# Altium PCB IMOB_TAG_hv1.PcbDoc
Units mm, origin at the board's own origin, x right, y up, seen from the top; angles counter-clockwise.
Board outline 23.94 x 25.73 mm, 2 copper layers (Top Layer, Bottom Layer); 45 components, 28 nets, 116 pads, 102 vias.
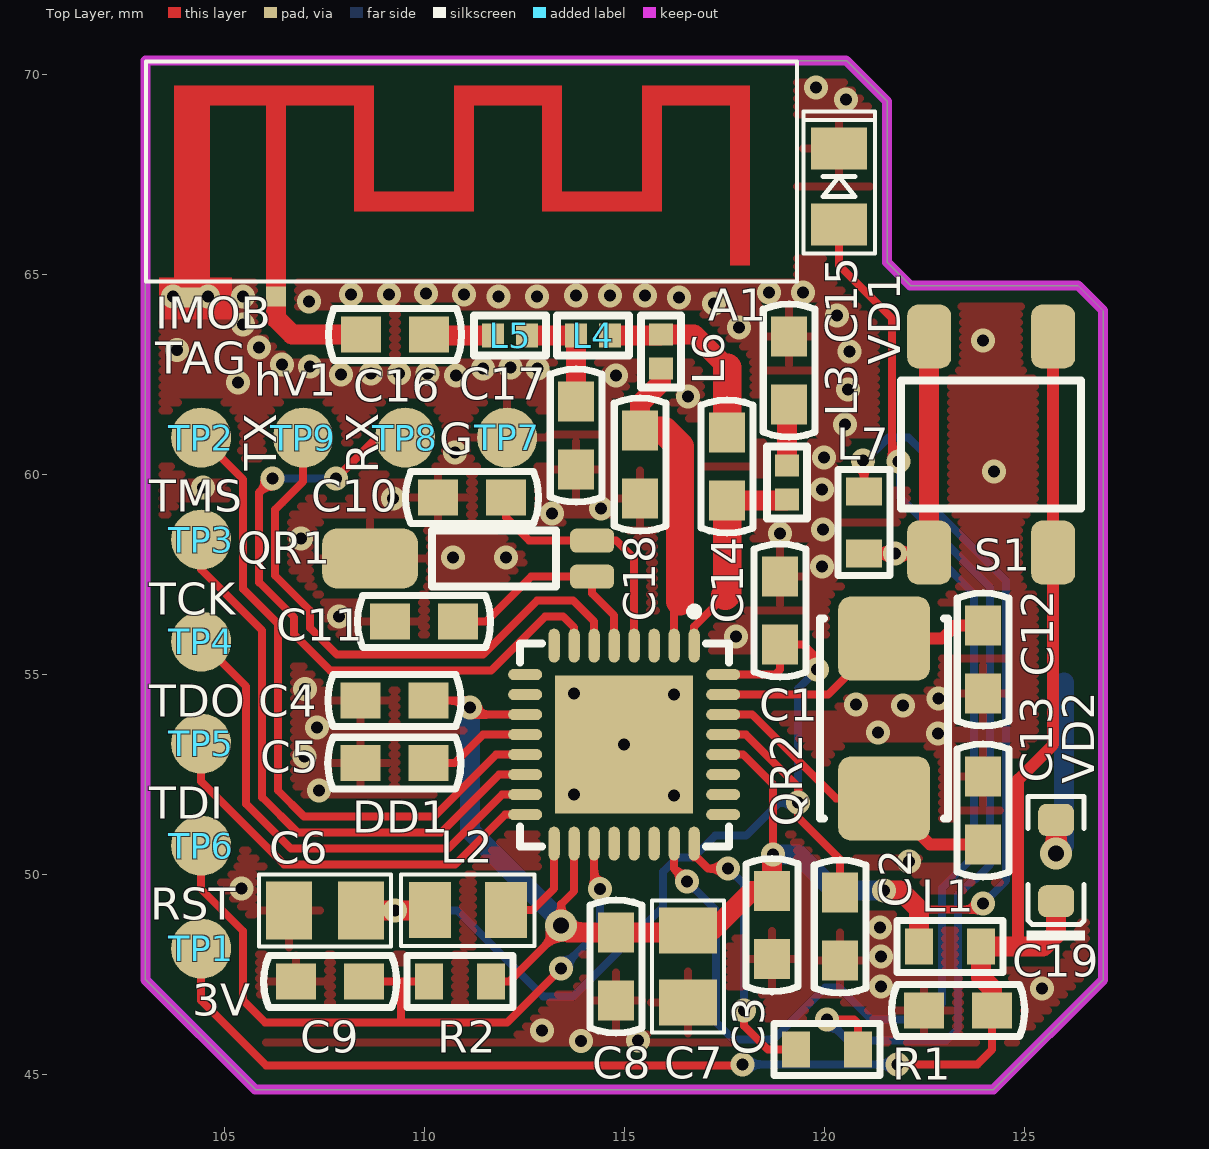
[diagram p0: Top Layer view]
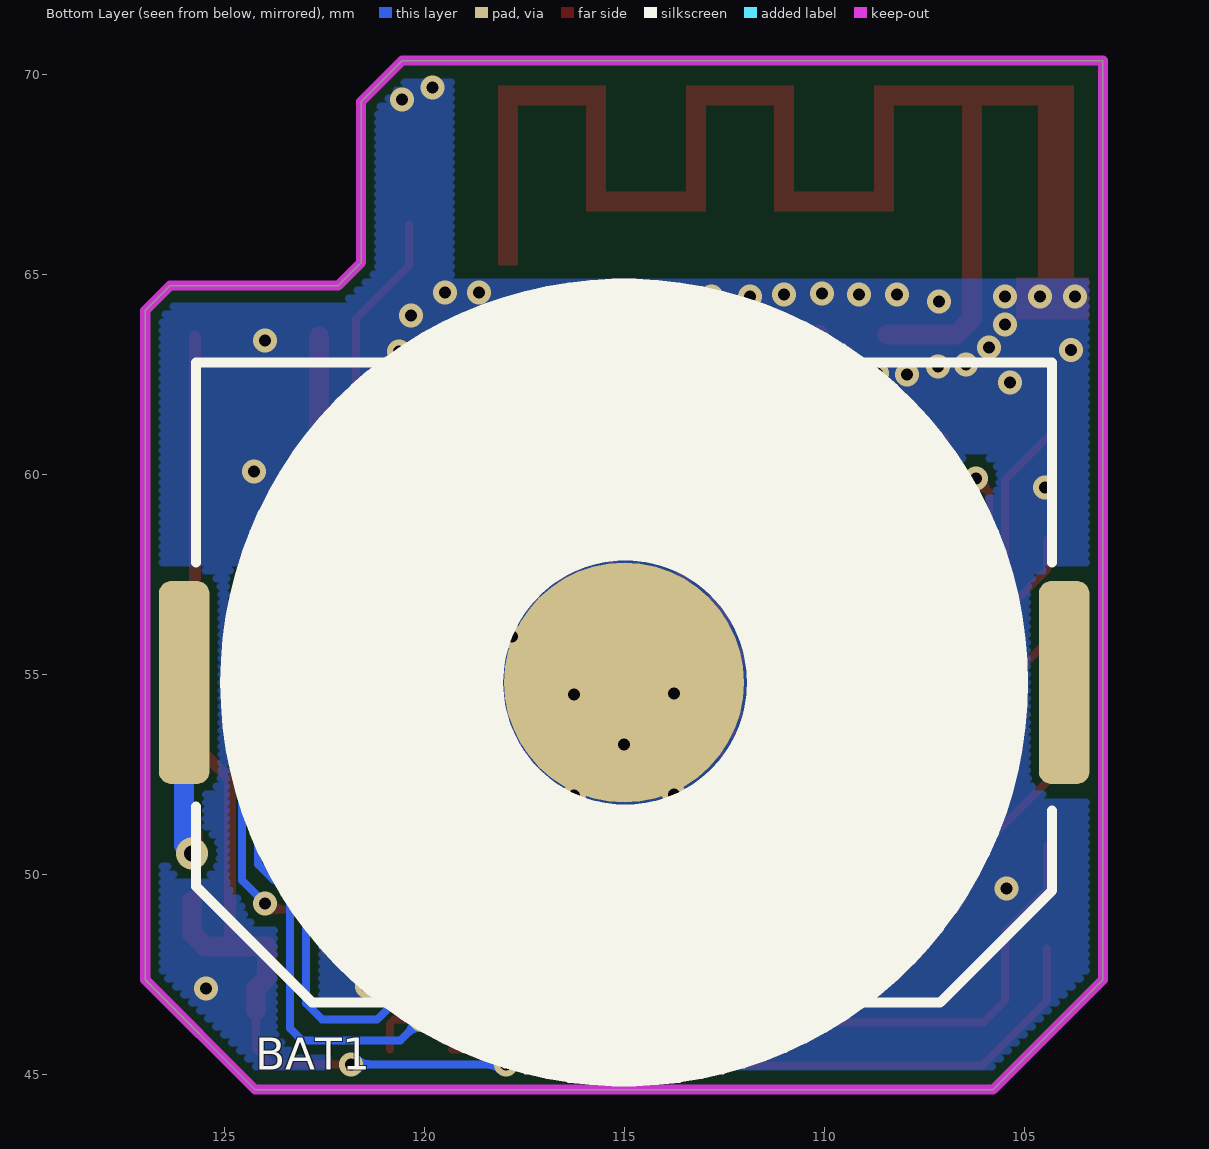
[diagram p1: Bottom Layer view, seen from below]
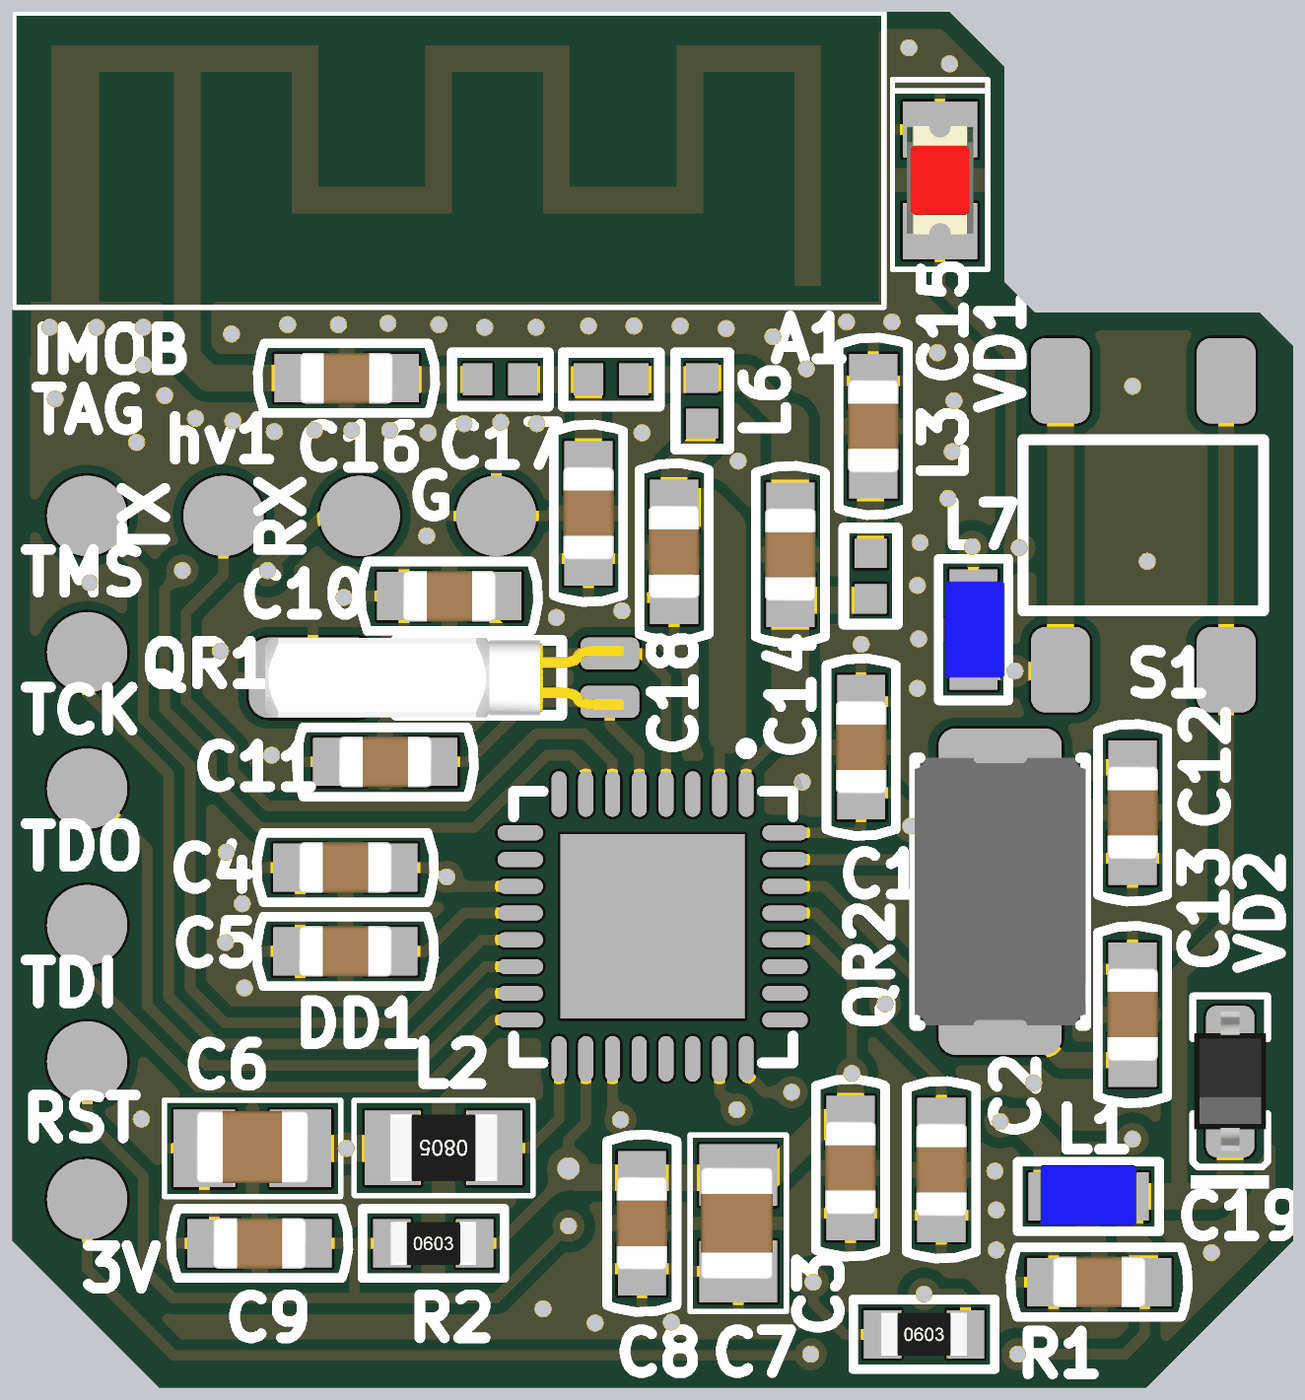
[diagram p2: 3D render of the assembled board from above, using the file's embedded part models]

## Layer stack, top to bottom
Top Solder: solder mask 0.0102, Solder Resist, Dk 3.5
Top Layer: signal copper 0.0356
Dielectric 1: dielectric 0.32, FR-4, Dk 4.8
Bottom Layer: signal copper 0.0356
Bottom Solder: solder mask 0.0102, Solder Resist, Dk 3.5

## Board outline
103.03,47.37 105.775,44.625 124.229,44.625 126.973,47.37 126.973,64.1 126.348,64.725 122.15,64.725 121.575,65.3 121.575,69.325 120.55,70.35 103.03,70.35

## Design rules (kind name [scope] priority, off if disabled: settings)
Clearance [All] p1: gap=0.2 ignorepadtopadclearanceinfootprint=FALSE
ComponentClearance [All] p1: gap=0.05 collisioncheckmode=3 verticalgap=2540 showdistances=FALSE
HoleToHoleClearance [All] p1: gap=0.05 allowstackedmicrovias=TRUE
MinimumSolderMaskSliver [All] p1: minsoldermaskwidth=0.05
PolygonConnect DIRECT [InComponent('BAT1')] p1: connectstyle=Direct reliefconductorwidth=0.254 reliefentries=4 polygonreliefangle="90 Angle" airgapwidth=0.254
PolygonConnect VIA [IsVia] p2: connectstyle=Direct reliefconductorwidth=0.254 reliefentries=4 polygonreliefangle="90 Angle" airgapwidth=0.254
PolygonConnect [All] p3: connectstyle=Relief reliefconductorwidth=0.2 reliefentries=4 polygonreliefangle="90 Angle" airgapwidth=0.2
RoutingVias [All] p1: holewidth=0.4 width=0.8 viastyle="Through Hole" minholewidth=0.3 minwidth=0.6 maxholewidth=0.5 maxwidth=1
ShortCircuit ANTENNA [InComponent('A1')] p1: allowed=TRUE
ShortCircuit [All] p2: allowed=FALSE
SilkToSilkClearance [All] p1: silktosilkclearance=0.05
SilkToSolderMaskClearance [IsPad] p1: minsilkscreentomaskgap=0.05 clearancetoexposedcopper=TRUE
SolderMaskExpansion [All] p1: expansion=0.102
Width [All] p1: maxlimit=3 minlimit=0.2 preferedwidth=0.5
24 further rules are at their usual default settings.

## Classes and differential pairs
component class [5]-CONNECTORS: BAT1 C19 TP1 TP2 TP3 TP4 TP5 TP6 TP7 TP8 TP9 VD2
component class [4]-RF: A1 C14 C15 C16 C17 C18 L3 L4 L5 L6
component class [3]-MCU: C1 C2 C3 C4 C5 C6 C7 C8 C9 C10 C11 C12 C13 DD1 L1 L2 L7 QR1 QR2 R1 R2 S1 VD1

## Components (designator, comment, footprint, x,y, rotation, side; value= is the part's Value field where it differs from the comment)
A1 "Antenna Wi-Fi" Antenna_WiFi 106.3,64.45 r0 top
BAT1 "3034TR" 3034-TR 115,54.7 r180 bottom locked
C1 "0.1uF" CC0603 118.9,56.6 r90 top
C2 "0.1uF" CC0603 120.4,48.7 r270 top
C3 "0.1uF" CC0603 118.7,48.735 r90 top
C4 "0.1uF" CC0603 109.255,54.35 r0 top
C5 "1uF" CC0603 109.255,52.785 r180 top
C6 "10uF" CC0805 107.515,49.1 r0 top
C7 "10uF" CC0805 116.6,47.7 r90 top
C8 "0.1uF" CC0603 114.8,47.7 r90 top
C9 "0.1uF" CC0603 107.65,47.325 r0 top
C10 "22pF" CC0603 111.2,59.425 r180 top
C11 "22pF" CC0603 110,56.325 r180 top
C12 "22pF" CC0603 123.975,55.375 r270 top
C13 "22pF" CC0603 123.975,51.6 r90 top
C14 "1pF" CC0603 117.575,60.2 r90 top
C15 "6.8pF" CC0603 119.125,62.6 r270 top
C16 "12pF" CC0603 109.275,63.5 r180 top
C17 "1pF" CC0603 113.8,60.975 r270 top
C18 "1pF" CC0603 115.4,60.25 r270 top
C19 "0.1uF" CC0603 123.35,46.6 r0 top
DD1 "CC2650" QFN32_TI 116.75,55.725 r270 top
L1 "BLM18HE152SN1" L0603 123.15,48.2 r180 top
L2 "10uH" RC0805 111.09,49.11 r180 top
L3 "2.4nH" L0402 119.075,59.8 r270 top
L4 "2nH" L0402 114.225,63.475 r180 top
L5 "2nH" L0402 112.15,63.475 r180 top
L6 "2.4nH" L0402 115.925,63.075 r90 top
L7 "BLM18HE152SN1" L0603 121,58.8 r90 top
QR1 "MS3V-T1R" MS3V-T1R 114.2,57.45 r180 top
QR2 "SJK-6L-24.0" AC5032_2 121.5,53.9 r270 top
R1 "1k" RC0603 120.075,45.625 r0 top
R2 "100k" RC0603 110.9,47.325 r0 top
S1 "IT-1147" IT-1147 125.725,58.05 r90 top locked value={Value}
TP1 "TESTPOINT1" TESTPOINT1 104.425,48.15 r0 top
TP2 "TESTPOINT1" TESTPOINT1 104.425,60.925 r90 top
TP3 "TESTPOINT1" TESTPOINT1 104.425,58.375 r90 top
TP4 "TESTPOINT1" TESTPOINT1 104.425,55.825 r90 top
TP5 "TESTPOINT1" TESTPOINT1 104.425,53.275 r90 top
TP6 "TESTPOINT1" TESTPOINT1 104.425,50.725 r90 top
TP7 "TESTPOINT1" TESTPOINT1 112.075,60.925 r90 top
TP8 "TESTPOINT1" TESTPOINT1 109.525,60.925 r90 top
TP9 "TESTPOINT1" TESTPOINT1 106.975,60.925 r90 top
VD1 "LED_0805" LED0805 120.375,67.15 r270 top
VD2 "PMEG1020EJ" SOD323 125.8,50.35 r270 top

## Footprints (in the part's own frame and the unit in brackets; to place one, negate y for a bottom-side part, rotate by r counter-clockwise, add the part's x,y. Pads: shape width x height; smd on the part's side, far side on the other; paste and mask are expansions set on the pad)
3034-TR [mm] "CR2032 Holder"
  rrect50% 1.27x5.08 smd mask+0.05: 1(-11,0.1) 1(11,0.1)
  round 6 smd mask+0.05: 2(0,0.1)
  silkscreen extent -10.7,-9.9 10.7,10.1
AC5032_2 [mm]
  rrect30% 2.1x2.3 smd mask+0.05: 1(-2,0) 2(2,0)
  silkscreen extent -2.5,-1.6 2.5,1.6, body extent -2.5,-1.6 2.5,1.6, height 1.2
Antenna_WiFi [mm] "2.43Ghz 2.5dBi"
  rect 0.5x0.5 smd paste-10 mask+0.05: 1(0,0)
  rect 0.9x0.5 smd paste-10 mask+0.05: 2(-2.1,-0.025)
  Top Layer region: -2.55,0.1 -1.65,0.1 -1.65,4.9 -2.55,4.9
  Top Layer region: -2.55,4.775 2.45,4.775 2.45,5.275 -2.55,5.275
  Top Layer region: -0.25,-0.2 0.25,-0.2 0.25,4.9 -0.25,4.9
  Top Layer region: 1.95,2.125 2.45,2.125 2.45,4.9 1.95,4.9
  Top Layer region: 2.3,2.125 4.6,2.125 4.6,2.625 2.3,2.625
  Top Layer region: 4.45,2.125 4.95,2.125 4.95,4.9 4.45,4.9
  Top Layer region: 4.45,4.775 7.15,4.775 7.15,5.275 4.45,5.275
  Top Layer region: 6.65,2.125 7.15,2.125 7.15,5 6.65,5
  Top Layer region: 6.9,2.125 9.4,2.125 9.4,2.625 6.9,2.625
  Top Layer region: 9.15,2.125 9.65,2.125 9.65,4.9 9.15,4.9
  Top Layer region: 9.15,4.775 11.85,4.775 11.85,5.275 9.15,5.275
  Top Layer region: 11.35,0.775 11.85,0.775 11.85,5 11.35,5
  silkscreen extent -3.25,0.38 13.03,5.87
CC0603 [mm]
  rect 1x0.9 smd paste-25.4 mask+0.05: 1(-0.85,0) 2(0.85,0)
  silkscreen extent -1.66,-0.65 1.66,0.65, body extent -0.87,-0.47 0.88,0.48, height 0.85
CC0805 [mm]
  rect 1.15x1.45 smd paste-25.4 mask+0.05: 1(-0.9,0) 2(0.9,0)
  silkscreen extent -1.65,-0.9 1.65,0.9, body extent -1.05,-0.65 1.05,0.7, height 1.1
IT-1147 [mm]
  rrect50% 1.6x1.1 smd mask+0.05: 1(0,0) 2(5.4,0) 3(0,3.1) 4(5.4,3.1)
  silkscreen extent 1.1,-0.7 4.3,3.8
L0402 [mm]
  rect 0.55x0.6 smd mask+0.05: 1(-0.425,0) 2(0.425,0)
  silkscreen extent -0.9,-0.5 0.9,0.5
L0603 [mm]
  rect 0.7x0.9 smd paste-25.4 mask+0.05: 1(-0.775,0) 2(0.774,0)
  silkscreen extent -1.32,-0.65 1.33,0.65, body extent -0.9,-0.58 0.9,0.54, height 1
LED0805 [mm]
  rect 1.05x1.4 smd paste-25.4 mask+0.05: 1(0.9,0) 2(-1,0)
  silkscreen extent -1.93,-0.89 1.62,0.89, body extent -1.06,-0.62 0.96,0.63, height 1.1
MS3V-T1R [mm]
  rrect50% 1.1x0.6 smd mask+0.05: 1(0,0) 2(0,-0.9)
  rrect50% 2.4x1.5 smd mask+0.05: 3(5.55,-0.45)
  silkscreen extent 0.9,-1.15 4,0.25, body extent -0.25,-1.19 6.45,0.29, height 1.48
QFN32_TI [mm]
  oval 0.85x0.28 smd mask+0.05: 1(0,0) 2(0,-0.5) 3(0,-1) 4(0,-1.5) 5(0,-2) 6(0,-2.5) 7(0,-3) 8(0,-3.5) 17(4.95,-3.5) 18(4.95,-3) 19(4.95,-2.5) 20(4.95,-2) 21(4.95,-1.5) 22(4.95,-1) 23(4.95,-0.5) 24(4.95,0)
  oval 0.28x0.85 smd mask+0.05: 9(0.725,-4.225) 10(1.225,-4.225) 11(1.725,-4.225) 12(2.225,-4.225) 13(2.725,-4.225) 14(3.225,-4.225) 15(3.725,-4.225) 16(4.225,-4.225) 25(4.225,0.725) 26(3.725,0.725) 27(3.225,0.725) 28(2.725,0.725) 29(2.225,0.725) 30(1.725,0.725) 31(1.225,0.725) 32(0.725,0.725)
  rect 3.45x3.45 smd mask+0.05: 33(2.475,-1.75)
  silkscreen extent -0.95,-4.35 5.02,0.87
RC0603 [mm]
  rect 0.7x0.9 smd paste-25.4 mask+0.05: 1(-0.775,0) 2(0.774,0)
  silkscreen extent -1.32,-0.65 1.33,0.65, body extent -0.8,-0.4 0.8,0.4, height 0.45
RC0805 [mm]
  rect 1.05x1.4 smd paste-25.4 mask+0.05: 1(-0.95,0) 2(0.95,0)
  silkscreen extent -1.67,-0.89 1.67,0.89, body extent -1,-0.62 1,0.63, height 0.6
SOD323 [mm]
  rrect50% 0.8x0.9 smd mask+0.05: 1(-1.016,0) 2(1.016,0)
  silkscreen extent -1.6,-0.74 2,0.72, body extent -1.3,-0.67 1.3,0.67, height 1.1
TESTPOINT1 [mm]
  round 1.5 smd mask+0.05: 1(0,0)

## Part data
A1: "2.43GHz"
BAT1: library part 3034, "CR2032 holder smd"
C1 C2 C3 C4 C5 C8 C9 C10 C11 C12 C13 C14 C15 C16 C17 C18 C19: library part CC0603, "CC0603"
C6 C7: library part CC0805, "CC0805"
DD1: library part CC2650RHB, "CC2650RHBT"
L1 L7: library part L0603, "L0603"
L2: library part L0805, "L0805"
L3 L4 L5 L6: library part L0402, "L0402"
QR1: "CRYSTAL_32768 Hz"
QR2: library part AC5032_2, "AC5032/2"
R1 R2: library part RC0603, "RC0603"
S1: "Switch, Single Pole, Single Throw, Normally Open"
VD2: library part PMEG2010

## Via types
v1: diameter 0.6, hole 0.3, Top Layer to Bottom Layer, tented both sides, 100 vias
v2: diameter 0.8, hole 0.4, Top Layer to Bottom Layer, tented both sides, 2 vias

## Nets (pads, with @x,y where several pads share a name; then routed paths per layer and width w, separated by ;. In a path a pad name is that pad's centre, name@x,y a point inside that pad or via, vN(x,y) a via of type N, cw(c..) or ccw(c..) an arc to the next point about the centre after c; other vN are vias at no path point)
+3V: C19.2 L1.1 S1.1 S1.2 TP1.1 VD2.2 | length 43.1
  Top Layer w0.2: TP1.1 104.425,46.85 106.044,45.231 117.956,45.231 v1(117.956,45.252) ; v1(121.827,45.252) 123.827,45.252 124.2,45.625 C19.2
  Top Layer w0.3: 124.925,48.2 124.85,48.275 124.85,52.375 125.725,53.25 S1.1 S1.2
  Top Layer w0.5: C19.2 124.2,47.15 123.925,47.425 L1.1 124.925,48.2 125.475,48.2 125.8,48.525 VD2.2
  Bottom Layer w0.2: v1(117.956,45.252) v1(121.827,45.252)
+3V_F: C3.2 C4.2 C7.2 C8.2 DD1.11 DD1.18 DD1.28 L1.2 L7.2 R2.2 | length 45.2
  Top Layer w0.2: C4.2 110.95,54.35 111.3,54 DD1.11 ; R2.2 112.125,47.325 113.425,48.625 v2(113.425,48.725) 113.425,49.259 113.75,49.584 DD1.18 ; DD1.28 117.975,53 118.725,52.25 v1(118.725,50.5) ; v1(120.975,60.35) 121,60.325 L7.2 ; 122.376,49.124 123.824,49.124 v1(123.975,49.275)
  Top Layer w0.5: v2(113.425,48.725) 113.6,48.55 C8.2 116.55,48.55 C7.2 117.201,48.6 118.185,49.585 C3.2 118.7,50.475 v1(118.725,50.5) ; v1(121.5,49.6) 121.9,49.6 122.376,49.124 L1.2
  Bottom Layer w0.2: v1(120.975,60.35) 121.029,60.35 121.607,60.928 122.104,60.928 122.475,60.557 122.475,59.416 124.55,57.341 124.55,49.85 v1(123.975,49.275)
  Bottom Layer w0.5: v1(111.15,54.175) 111.15,51.1 v2@113.375,48.875 ; v1(118.725,50.5) 119.35,50.5 120.25,49.6 v1(121.5,49.6)
BT_RX: DD1.7 TP8.1 | length 16.8
  Top Layer w0.2: v1(106.205,59.903) 106.205,59.88 105.875,59.55 105.875,57.306 106.75,56.431 106.75,56 107.65,55.1 111.675,55.1 113.025,56.45 113.475,56.45 113.75,56.175 DD1.7 ; v1(107.797,59.903) 108.819,60.925 TP8.1
  Bottom Layer w0.2: v1@106.3,59.998 v1(106.205,59.903) v1(107.797,59.903)
BT_TX: DD1.6 TP9.1 | length 14.2
  Top Layer w0.2: 106.453,59.303 106.275,59.125 106.275,57.472 107.15,56.597 107.15,56.166 107.816,55.5 111.475,55.5 112.825,56.85 113.725,56.85 114.25,56.325 DD1.6 ; 106.454,59.303 106.975,59.824 TP9.1
GND: A1.2 BAT1.2 C1.2 C2.2 C3.1 C4.1 C5.2 C6.1 C7.1 C8.1 C9.1 C10.2 C11.2 C12.2 C13.2 C15.1 C17.2 C18.2 C19.1 DD1.33 QR1.3 TP7.1 VD1.2
  other v1: 113.925,45.835 115.35,45.85 112.95,46.1 125.45,47.15 121.425,47.2 121.425,47.95 121.4,48.675 105.438,49.65 122.125,50.325 116.25,51.975 113.75,52 107.367,52.1 107.013,52.95 115,53.25 122.85,53.525 121.35,53.55 107.325,53.675 121.975,54.225 120.8,54.25 122.863,54.4 116.25,54.5 113.75,54.525 107.025,54.637 117.8,55.95 107.875,56.45 119.95,57.7 110.725,57.925 112.04,57.925 106.918,58.4 118.9,58.525 119.976,58.625 113.2,59.025 114.425,59.15 109.225,59.4 119.95,59.625 104.475,59.675 124.25,60.075 120,60.425 110.775,60.55 120.522,61.25 116.6,61.95 120.6,62.125 105.35,62.3 110.8,62.478 114.8,62.478 107.925,62.5 108.675,62.525 109.375,62.525 110.084,62.525 111.475,62.65 112.834,62.65 112.158,62.675 107.15,62.7 106.45,62.75 120.634,63.075 103.825,63.112 105.875,63.175 123.975,63.35 117.875,63.675 105.475,63.75 120.325,63.975 117.25,64.275 107.125,64.325 116.375,64.425 103.725,64.45 104.6,64.45 105.475,64.45 111.859,64.45 112.819,64.45 113.8,64.475 114.65,64.475 115.516,64.475 108.175,64.5 109.125,64.5 111,64.5 110.05,64.525 118.625,64.55 119.475,64.55 120.55,69.375 119.791,69.675
NetA1_1: A1.1 C16.2 | length 2.8
  Top Layer w0.5: A1.1 106.3,63.9 106.7,63.5 C16.2
NetBAT1_1: BAT1.1@126,54.8 VD2.1 | length 5.2
  Top Layer w0.5: v2(125.8,50.525) VD2.1
  Bottom Layer w0.5: v2(125.8,50.525) 126,50.725 BAT1.1@126,54.8
NetC1_1: C1.1 C2.1 C6.2 DD1.29 DD1.32 L2.2 | length 27.7
  Top Layer w0.2: DD1.29 118.041,53.5 119.35,52.191 v1(119.35,51.8) 119.35,51.425 120.4,50.375 C2.1 ; DD1.32 118.775,55 118.9,55.125 C1.1 119.475,55.75 119.825,55.4 v1(119.825,55.125)
  Top Layer w0.5: C6.2 v1(109.273,49.1) 110.13,49.1 L2.2
  Bottom Layer w0.2: v1(109.273,49.1) 110.825,49.1 112.975,46.95 113.725,46.95 115.975,49.2 115.975,50.074 116.326,50.425 116.725,50.425 117.275,50.975 118.05,50.975 118.875,51.8 v1(119.35,51.8) 119.35,54.65 v1(119.825,55.125)
NetC5_1: C5.1 DD1.12 | length 2.7
  Top Layer w0.2: C5.1 110.76,52.785 111.475,53.5 DD1.12
NetC9_2: C9.2 DD1.19 R2.1 TP6.1 | length 19.3
  Top Layer w0.2: TP6.1 104.425,49.635 105.475,48.585 105.475,46.85 106.025,46.3 109.425,46.3 ; C9.2 109.425,47.325 ; R2.1 109.425,47.325 ; v1(113.425,47.65) 112.075,46.3 109.425,46.3 ; DD1.19 114.25,49.785 v1(114.4,49.635) ; 109.425,46.3 109.425,47.325
  Bottom Layer w0.2: v1(113.425,47.65) 114.4,48.625 v1(114.4,49.635)
NetC12_1: C12.1 DD1.31 QR2.1 | length 7.2
  Top Layer w0.2: DD1.31 120.1,54.5 QR2.1
  Top Layer w0.3: QR2.1 122.95,55.9 123.275,56.225 C12.1
NetC13_1: C13.1 DD1.30 QR2.2 | length 7.8
  Top Layer w0.2: DD1.30 118.201,54 120.301,51.9 QR2.2
  Top Layer w0.3: QR2.2 122.65,50.75 C13.1
NetC14_2: C14.2 L4.1 L6.2 | length 4.9
  Top Layer w0.5: L4.1 115.9,63.475 L6.2 116.75,63.5 117.575,62.675
  Top Layer w0.71: C14.2 117.575,62.675
NetC15_2: C15.2 L3.1 | length 1.5
  Top Layer w0.5: L3.1 119.075,61.7 C15.2
NetC16_1: C16.1 L5.2 | length 1.6
  Top Layer w0.5: C16.1 110.15,63.475 L5.2
NetC17_1: C17.1 L4.2 L5.1 | length 2.9
  Top Layer w0.5: L5.1 L4.2 C17.1
NetDD1_17: DD1.17 L2.1 | length 2.6
  Top Layer w0.2: L2.1 112.71,49.11 113.25,49.65 DD1.17
NetDD1_23: DD1.23 L7.1 S1.3 S1.4 | length 31.8
  Top Layer w0.2: DD1.23 116.25,50.15 v1(116.575,49.825)
  Top Layer w0.3: L7.1 v1(121.775,58.025) 122.6,58.025 S1.3
  Top Layer w0.5: S1.3 S1.4
  Bottom Layer w0.2: v1(116.575,49.825) 117.3,49.1 117.3,46.3 117.725,45.875 118.725,45.875 120.025,47.175 120.375,47.175 121.175,46.375 122.55,46.375 122.95,46.775 122.95,49.664 123.75,50.464 123.75,57.009 122.734,58.025 v1(121.775,58.025)
NetDD1_24: DD1.24 R1.1 | length 7
  Top Layer w0.2: DD1.24 116.75,50.425 116.824,50.425 117.099,50.15 v1(117.6,50.15) ; v1(118,46.6) 118,46.216 118.591,45.625 R1.1
  Bottom Layer w0.2: v1(117.6,50.15) 118,49.75 v1(118,46.6)
NetR1_2: R1.2 VD1.1 | length 27.1
  Top Layer w0.2: v1(120.075,46.375) 120.75,46.375 120.849,46.276 R1.2 ; VD1.1 120.375,65.225 121.7,63.9 121.7,60.484 v1(121.856,60.328)
  Bottom Layer w0.2: v1(120.075,46.375) 120.598,45.852 123.052,45.852 123.35,46.15 123.35,49.499 123.726,49.875 123.775,49.875 124.15,50.25 124.15,57.175 121.9,59.425 121.9,60.284 v1(121.856,60.328)
RF_N: C18.1 DD1.2 L6.1 | length 7.8
  Top Layer w0.2: DD1.2 116.25,56.675
  Top Layer w0.5: C18.1 115.4,61.775 115.925,62.3 L6.1
  Top Layer w0.7: C18.1 116,61.1 116.4,60.7 116.4,56.825
RF_P: C14.1 DD1.1 L3.2 | length 5.5
  Top Layer w0.2: DD1.1 116.75,56.199 117.525,56.974
  Top Layer w0.5: C14.1 119.05,59.35 L3.2
  Top Layer w0.71: 117.525,56.974 117.575,57.024 C14.1
TCK: DD1.14 TP3.1 | length 14.6
  Top Layer w0.2: TP3.1 104.425,57.625 105.95,56.1 105.95,51.931 106.831,51.05 110.425,51.05 111.875,52.5 DD1.14
TDI: DD1.16 TP5.1 | length 10.4
  Top Layer w0.2: TP5.1 104.425,52.325 106.5,50.25 110.775,50.25 112.025,51.5 DD1.16
TDO: DD1.15 TP4.1 | length 12.5
  Top Layer w0.2: TP4.1 105.55,54.7 105.55,51.766 106.666,50.65 110.6,50.65 111.95,52 DD1.15
TMS: DD1.13 TP2.1 | length 16.7
  Top Layer w0.2: TP2.1 105.475,59.875 105.475,57.141 106.35,56.266 106.35,52.097 106.997,51.45 110.25,51.45 111.8,53 DD1.13
X32K_Q1: C10.1 DD1.4 QR1.2 | length 6.3
  Top Layer w0.2: C10.1 112.05,58.925 112.625,58.35 QR1.2 114.8,58.35 115.25,57.9 DD1.4
X32K_Q2: C11.1 DD1.5 QR1.1 | length 5.8
  Top Layer w0.2: C11.1 111.55,56.325 112.675,57.45 QR1.1 114.2,57.025 114.75,56.475 DD1.5
pads on no net: BAT1.1@104,54.8 DD1.3 DD1.8 DD1.9 DD1.10 DD1.20 DD1.21 DD1.22 DD1.25 DD1.26 DD1.27

## Polygon pours and split planes (outlines as drawn)
GND on Bottom Layer "GND_L02_P000" (hatched Horizontal grid 0.2 track 0.2, remove dead copper, pour order 0): 101.825,71.25 102.325,71.75 125.65,71.75 125.65,70.875 130.575,65.95 130.575,41.975 116.55,41.975 114.775,40.2 114.125,40.85 105.55,40.85 99.75,46.65
GND on Top Layer "GND_L01_P002" (hatched Horizontal grid 0.2 track 0.2, remove dead copper, pour order 2): 99.6,72.375 100.475,73.25 131.75,73.25 131.75,36.025 130.3,37.475 97.475,37.475

## Keep-outs
Keep-Out Layer:
  the board outline again, w0.254

## Other copper
Top Layer:
  rectangle net GND: 103.375,63.875 105.2,64.925
  pour cut-out: 103.03,70.35 119.325,70.35 119.325,64.825 103.03,64.825
Bottom Layer:
  pour cut-out: 103.03,70.35 119.325,70.35 119.325,64.825 103.03,64.825

## Silkscreen, mask and mechanical layers (free items; w line width, h text height)
Top Overlay:
  text "IMOB" at 103.275,63.65 h0.8
  text "TAG" at 103.275,62.525 h0.8
  text "hv1" at 105.75,61.975 h0.8
  text "G" at 110.375,60.5 h0.8
  text "TX" at 106.3,60.1 h0.8 r90
  text "RX" at 108.85,60.025 h0.8 r90
  text "TMS" at 103.125,59.075 h0.8
  text "TCK" at 103.125,56.5 h0.8
  text "TDO" at 103.125,53.95 h0.8
  text "TDI" at 103.125,51.4 h0.8
  text "RST" at 103.15,48.875 h0.8
  text "3V" at 104.2,46.475 h0.8
Bottom Overlay:
  circle w6.9: c114.975,54.8 r6.5